# Altium PCB PCB1.PcbDoc
Units mm, origin at the board's own origin, x right, y up, seen from the top; angles counter-clockwise.
Board outline 142.56 x 70.61 mm, 2 copper layers (Top Layer, Bottom Layer); 72 components, 59 nets, 301 pads, 34 vias.
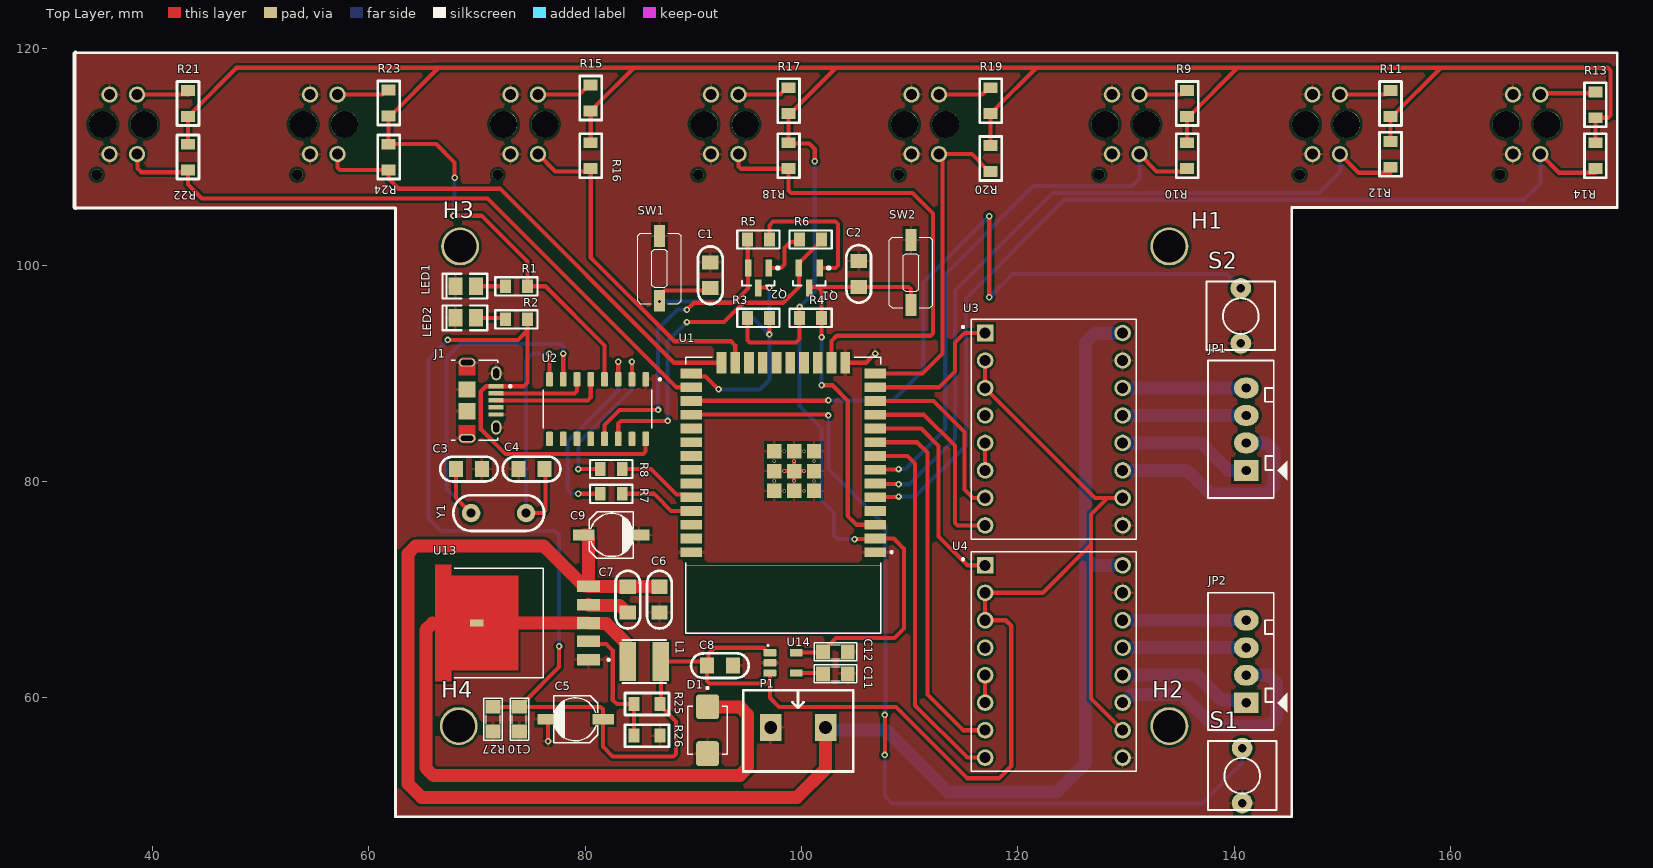
[diagram p0: Top Layer view]
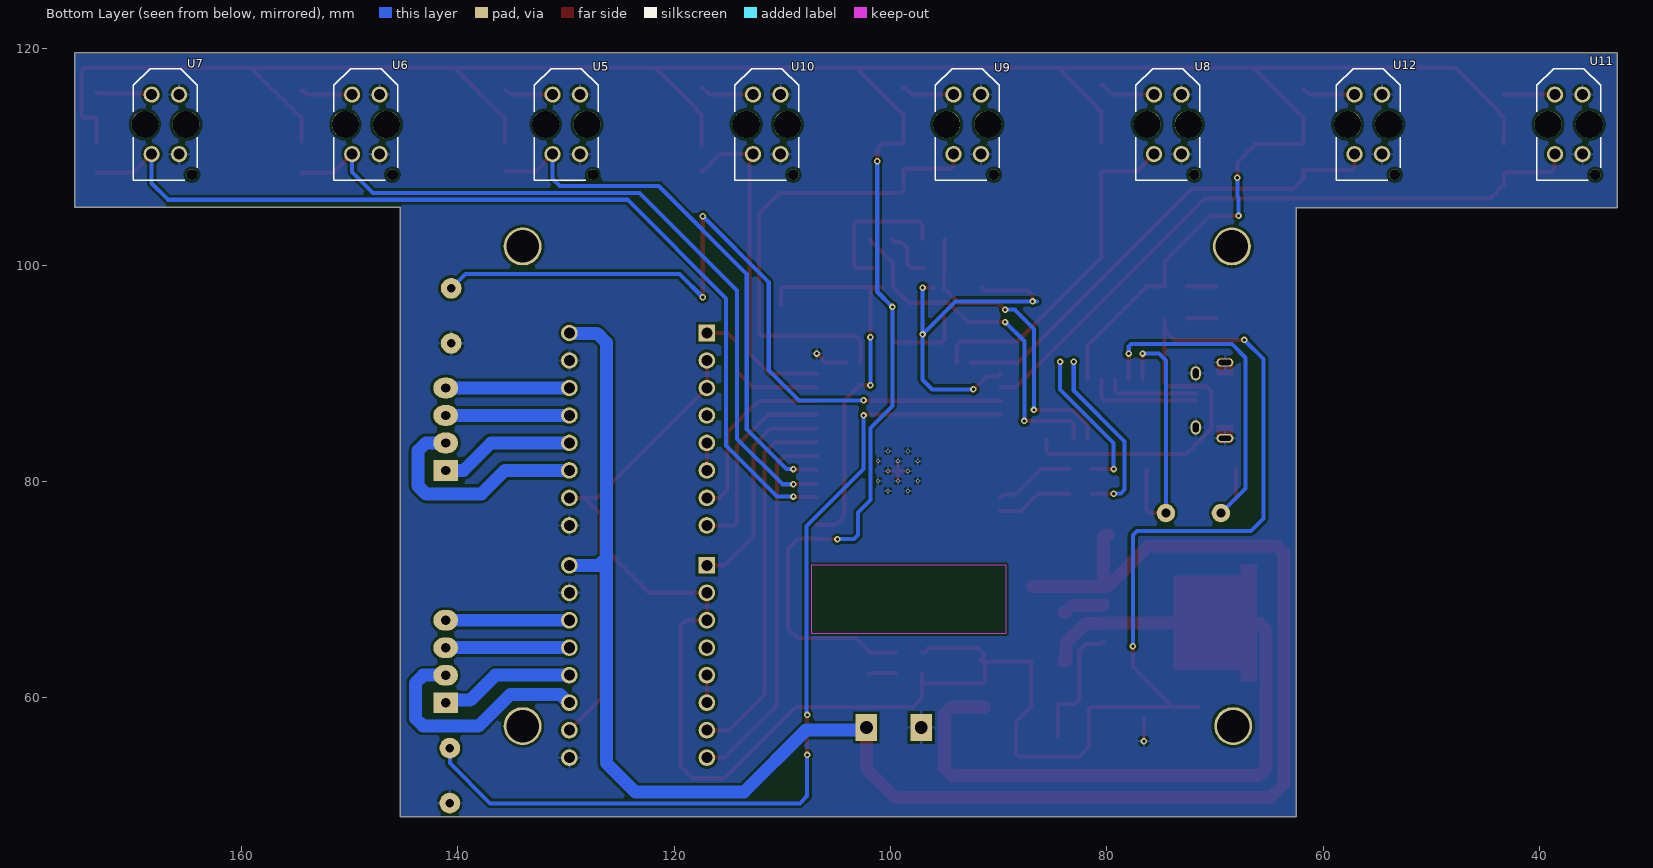
[diagram p1: Bottom Layer view, seen from below]
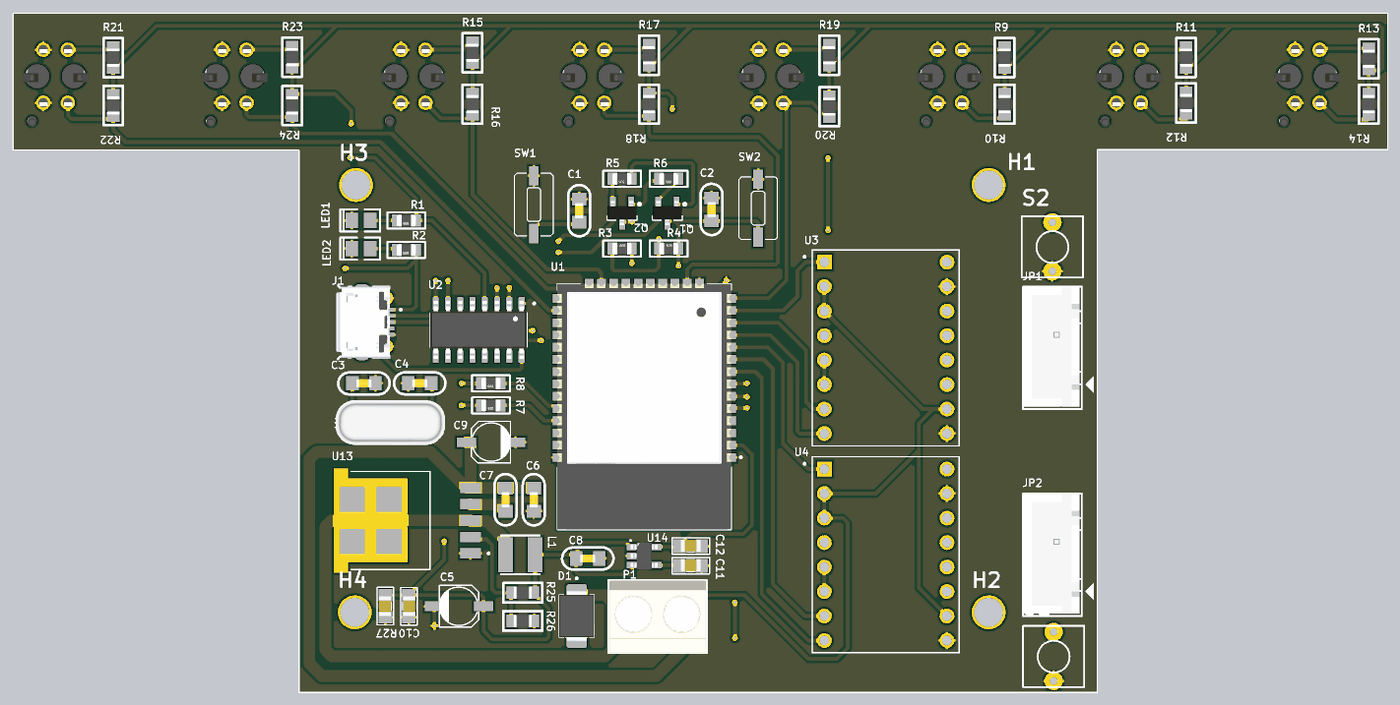
[diagram p2: 3D render of the assembled board from above, using the file's embedded part models]
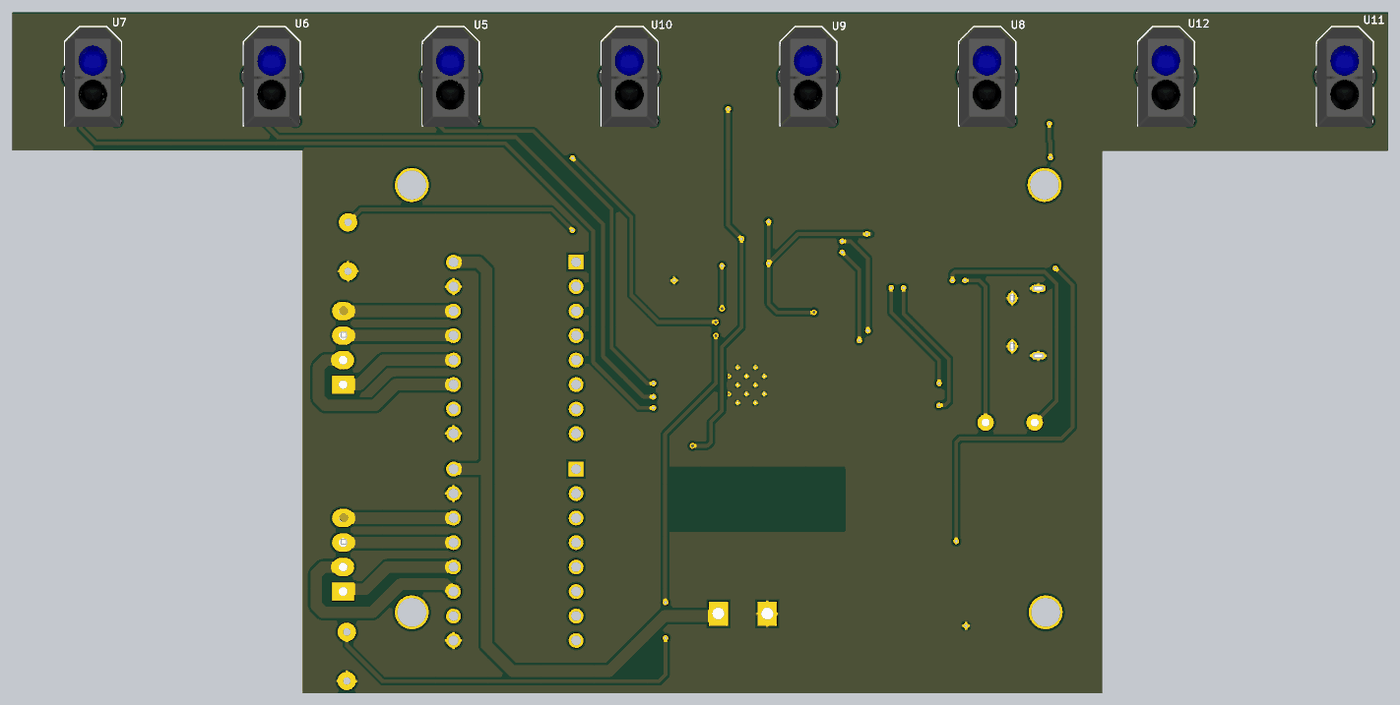
[diagram p3: 3D render of the assembled board from below, using the file's embedded part models]

## Layer stack, top to bottom
Top Solder: solder mask 0.0102, Solder Resist, Dk 3.5
Top Layer: signal copper 0.0356
Dielectric 1: dielectric 0.32, FR-4, Dk 4.8
Bottom Layer: signal copper 0.0356
Bottom Solder: solder mask 0.0102, Solder Resist, Dk 3.5

## Board outline
32.893,105.283 62.484,105.283 62.484,49.022 145.288,49.022 145.288,58.293 145.288,105.331 175.387,105.331 175.387,119.634 32.893,119.634 32.829,119.57 32.829,105.346

## Design rules (kind name [scope] priority, off if disabled: settings)
Clearance [All] p1: gap=0.254 ignorepadtopadclearanceinfootprint=TRUE
PolygonConnect [All] p1: connectstyle=Relief reliefconductorwidth=0.254 reliefentries=4 polygonreliefangle="90 Angle" airgapwidth=0.254
RoutingVias [All] p1: holewidth=0.3 width=0.6 viastyle="Through Hole" minholewidth=0.3 minwidth=0.6 maxholewidth=0.3 maxwidth=0.6
SolderMaskExpansion [All] p1: expansion=0.102 istentingtop=FALSE
Width [All] p1: maxlimit=1.2 minlimit=0.381 preferedwidth=0.381 minimp=50.000000 maximp=50.000000 favimp=50.000000
30 further rules are at their usual default settings.

## Classes and differential pairs
component class Stepper: JP1 JP2 U3 U4
component class Sensor: R9 R10 R11 R12 R13 R14 R15 R16 R17 R18 R19 R20 R21 R22 R23 R24 U5 U6 U7 U8 U9 U10 U11 U12
component class MCU: C1 C2 C3 C4 H1 H2 H3 H4 J1 LED1 LED2 Q1 Q2 R1 R2 R3 R4 R5 R6 R7 R8 S1 S2 SW1 SW2 U1 U2 Y1
component class "ECU supply": C5 C6 C7 C8 C9 C10 C11 C12 D1 L1 P1 R25 R26 R27 U13 U14

## Components (designator, comment, footprint, x,y, rotation, side; value= is the part's Value field where it differs from the comment)
C1 "Cap Non-pol" C-NP-0805 91.567,99.06 r270 top value=10uF
C2 "Cap Non-pol" C-NP-0805 105.283,99.187 r270 top value=10uF
C3 "Cap Non-pol" C-NP-0805 69.266,81.153 r180 top value=10uF
C4 "Cap Non-pol" C-NP-0805 75.057,81.153 r0 top value=10uF
C5 "" Cap_smd_4_3MM 79.121,58.039 r180 top
C6 "Cap Non-pol" C-NP-0805 86.868,69.088 r90 top value=105
C7 "Cap Non-pol" C-NP-0805 83.947,69.088 r90 top value=105
C8 "Cap Non-pol" C-NP-0805 92.456,62.992 r180 top value=105
C9 "10uF" Cap_smd_4_3MM 82.423,75.057 r0 top
C10 "104" SM-0805 73.914,58.039 r90 top value=103
C11 "105" SM-0805 103.124,62.23 r180 top value=103
C12 "105" SM-0805 103.124,64.262 r180 top value=103
D1 "SS24" DIOM5336X265N 91.313,57.023 r270 top
H1 "Hole" "LO KHOAN 3MM" 133.985,101.727 r0 top
H2 "Hole" "LO KHOAN 3MM" 133.985,57.404 r0 top
H3 "Hole" "LO KHOAN 3MM" 68.453,101.727 r0 top
H4 "Hole" "LO KHOAN 3MM" 68.326,57.404 r0 top
J1 "10118194-0001LF" AMPHENOL_10118194-0001LF 69.088,87.503 r270 top
JP1 "JP4" CON4 141.097,81.026 r90 top value="Connector 4"
JP2 "JP4" CON4 141.097,59.563 r90 top value="Connector 4"
L1 "SRN4018-2R7M" INDP4040X180N 85.471,63.373 r0 top
LED1 "HSMH-C170" LED.SMD.RED 68.961,98.044 r0 top
LED2 "HSMH-C170" LED.SMD.RED 68.961,95.123 r0 top
P1 "Header 2 - M" "Medium - Header 2" 99.695,57.277 r0 top
Q1 "C1815" SOT23N 100.711,98.806 r270 top
Q2 "C1815" SOT23N 96.012,98.806 r270 top
R1 "RES_SMD_0805" "DIEN TRO 0805" 73.66,98.044 r0 top value=1k
R2 "RES_SMD_0805" "DIEN TRO 0805" 73.66,94.996 r0 top value=1k
R3 "RES_SMD_0805" "DIEN TRO 0805" 96.012,95.123 r180 top value=10k-0805
R4 "RES_SMD_0805" "DIEN TRO 0805" 100.838,95.123 r180 top value=10k
R5 "RES_SMD_0805" "DIEN TRO 0805" 96.012,102.362 r0 top value=10k
R6 "RES_SMD_0805" "DIEN TRO 0805" 100.838,102.362 r0 top value=10k
R7 "RES_SMD_0805" "DIEN TRO 0805" 82.423,78.867 r0 top value=1k
R8 "RES_SMD_0805" "DIEN TRO 0805" 82.423,81.153 r0 top value=1k
R9 "RESISTOR" R-0805 135.636,114.935 r270 top value=330R
R10 "RESISTOR" R-0805 135.636,110.109 r90 top value=10K
R11 "RESISTOR" R-0805 154.432,114.935 r270 top value=330R
R12 "RESISTOR" R-0805 154.432,110.236 r90 top value=10K
R13 "RESISTOR" R-0805 173.355,114.808 r270 top value=330R
R14 "RESISTOR" R-0805 173.355,110.109 r90 top value=10K
R15 "RESISTOR" R-0805 80.518,115.443 r270 top value=330R
R16 "RESISTOR" R-0805 80.518,110.109 r90 top value=10K
R17 "RESISTOR" R-0805 98.806,115.189 r270 top value=330R
R18 "RESISTOR" R-0805 98.806,110.109 r90 top value=10K
R19 "RESISTOR" R-0805 117.475,115.189 r270 top value=330R
R20 "RESISTOR" R-0805 117.475,109.855 r90 top value=10K
R21 "RESISTOR" R-0805 43.307,114.935 r270 top value=330R
R22 "RESISTOR" R-0805 43.307,109.982 r90 top value=10K
R23 "RESISTOR" R-0805 61.849,114.986 r270 top value=330R
R24 "RESISTOR" R-0805 61.849,109.982 r90 top value=10K
R25 "RESISTOR" R-0805 85.725,59.436 r0 top value=10K
R26 "RESISTOR" R-0805 85.725,56.515 r180 top value=3.3K
R27 "1K" SM-0805 71.501,58.039 r270 top
S1 "Tact SW - 2Pin" SW2 140.716,50.292 r90 top
S2 "Tact SW - 2Pin" SW2 140.589,92.773 r90 top
SW1 "PTS635" TactSwitches.PTS635.SMT 86.868,99.695 r270 top
SW2 "PTS635" TactSwitches.PTS635.SMT 110.109,99.314 r270 top
U1 "ESP32-WROOM-32" MODULE_ESP32-WROOM-32 98.314,78.729 r180 top
U2 "CH340G" SOIC127P600X180-16N 81.153,86.697 r270 top
U3 "A4988" MODULE_A4988_STEPPER_MOTOR_DRIVER_CARRIER 123.317,84.836 r0 top
U4 "A4988" MODULE_A4988_STEPPER_MOTOR_DRIVER_CARRIER 123.317,63.373 r0 top
U5 "TCRT5000" OPTO_TCRT5000 129.952,113.005 r90 bottom
U6 "TCRT5000" OPTO_TCRT5000 148.476,113.005 r90 bottom
U7 "TCRT5000" OPTO_TCRT5000 167.001,113.005 r90 bottom
U8 "TCRT5000" OPTO_TCRT5000 74.378,113.005 r90 bottom
U9 "TCRT5000" OPTO_TCRT5000 92.903,113.005 r90 bottom
U10 "TCRT5000" OPTO_TCRT5000 111.427,113.005 r90 bottom
U11 "TCRT5000" OPTO_TCRT5000 37.329,113.005 r90 bottom
U12 "TCRT5000" OPTO_TCRT5000 55.854,113.005 r90 bottom
U13 "XL4015" CONV_XL4015 69.977,66.929 r180 top
U14 "RT9193-33GB" SOT94P279X129-5N 98.298,63.246 r0 top
Y1 "XTAL" XTAL 72.009,77.089 r270 top

## Footprints (in the part's own frame and the unit in brackets; to place one, negate y for a bottom-side part, rotate by r counter-clockwise, add the part's x,y. Pads: shape width x height; smd on the part's side, far side on the other; paste and mask are expansions set on the pad)
AMPHENOL_10118194-0001LF [mm]
  rect 0.4x1.35 smd: 1(-1.3,2.675) 2(-0.65,2.675) 3(0,2.675) 4(0.65,2.675) 5(1.3,2.675)
  oval 0.775x1.55 hole 0.5 slot 1.15 at 90 deg mask+0: SH1(-3.5,0) SH4(3.5,0)
  rect 1.5x1.55 smd: SH2(1,0) SH3(-1,0)
  oval 1.3x0.95 hole 0.55 slot 0.9 at 0 deg: SH5(-2.5,2.7) SH6(2.5,2.7)
  Top Layer region: -2.3,-0.775 -3.445,-0.775 -3.471,-0.774 -3.497,-0.772 -3.523,-0.769 -3.549,-0.764 -3.574,-0.758 -3.6,-0.751 -3.624,-0.742 -3.648,-0.732 -3.672,-0.721 -3.695,-0.708 -3.717,-0.694 -3.739,-0.68 -3.76,-0.664 -3.78,-0.647 -3.799,-0.629 -3.817,-0.61 -3.834,-0.59 -3.85,-0.569 -3.864,-0.547 -3.878,-0.525 -3.891,-0.502 -3.902,-0.478 -3.912,-0.454 -3.921,-0.43 -3.928,-0.404 -3.934,-0.379 -3.939,-0.353 -3.942,-0.327 -3.944,-0.301 -3.945,-0.275 -3.945,0.275 -3.944,0.301 -3.942,0.327 -3.939,0.353 -3.934,0.379 -3.928,0.404 -3.921,0.43 -3.912,0.454 -3.902,0.478 -3.891,0.502 -3.878,0.525 -3.864,0.547 -3.85,0.569 -3.834,0.59 -3.817,0.61 -3.799,0.629 -3.78,0.647 -3.76,0.664 -3.739,0.68 -3.717,0.694 -3.695,0.708 -3.672,0.721 -3.648,0.732 -3.624,0.742 -3.6,0.751 -3.574,0.758 -3.549,0.764 -3.523,0.769 -3.497,0.772 -3.471,0.774 -3.445,0.775 -2.3,0.775
  Top Layer region: 3.471,0.774 3.497,0.772 3.523,0.769 3.549,0.764 3.574,0.758 3.6,0.751 3.624,0.742 3.648,0.732 3.672,0.721 3.695,0.708 3.717,0.694 3.739,0.68 3.76,0.664 3.78,0.647 3.799,0.629 3.817,0.61 3.834,0.59 3.85,0.569 3.864,0.547 3.878,0.525 3.891,0.502 3.902,0.478 3.912,0.454 3.921,0.43 3.928,0.404 3.934,0.379 3.939,0.353 3.942,0.327 3.944,0.301 3.945,0.275 3.945,-0.275 3.944,-0.301 3.942,-0.327 3.939,-0.353 3.934,-0.379 3.928,-0.404 3.921,-0.43 3.912,-0.454 3.902,-0.478 3.891,-0.502 3.878,-0.525 3.864,-0.547 3.85,-0.569 3.834,-0.59 3.817,-0.61 3.799,-0.629 3.78,-0.647 3.76,-0.664 3.739,-0.68 3.717,-0.694 3.695,-0.708 3.672,-0.721 3.648,-0.732 3.624,-0.742 3.6,-0.751 3.574,-0.758 3.549,-0.764 3.523,-0.769 3.497,-0.772 3.471,-0.774 3.445,-0.775 2.3,-0.775 2.3,0.775 3.445,0.775
  silkscreen extent -3.7,-1.45 3.7,4.1, body extent -4.02,-2.68 4.02,2.85, height 2.67
C-NP-0805 [mm] "Chip Capacitor; Non-polarized; Body 2.0 x 1.3 mm (LxW typ) [2012]"
  rect 1.3x1.5 smd: 1(-1.194,0) 2(1.194,0)
  silkscreen extent -2.67,-1.14 2.66,1.14, body extent -0.8,-0.43 0.8,0.43, height 0.79
Cap_smd_4_3MM [mm] "10uF SMD"
  rect 2x1 smd: 1(-2.54,0) 2(2.54,0)
  silkscreen extent -2.03,-2.16 2.04,2.16, body extent -2.7,-2.16 2.73,2.09, height 4.51
CON4 [mil] "CON4"
  rect 75x90 hole 34: 1(0,0)
  oval 75x90 hole 34: 2(100,0) 3(200,0) 4(300,0)
  silkscreen extent -100,-150 400,140, body extent -90,-90 398,136, height 276
CONV_XL4015 [mm]
  rect 2.16x1.07 smd: 1(-10.335,3.4) 2(-10.335,1.7) 3(-10.335,0) 4(-10.335,-1.7) 5(-10.335,-3.4)
  rect 1.27x0.635 smd paste-2 mask+0: 3.1(0,0)
  Top Layer region: 3.835,-5.4 2.365,-5.4 2.365,-4.35 -3.835,-4.35 -3.835,4.35 2.365,4.35 2.365,5.4 3.835,5.4
  silkscreen extent -12.3,-5.08 2.05,5.08
"DIEN TRO 0805" [mm] "Chip Resistor; Body 2.0 x 1.3 mm (LxW typ)"
  rect 1x1.27 smd: 1(-1.016,0) 2(1.016,0)
  silkscreen extent -1.96,-0.84 1.96,0.84, body extent -1,-0.62 1,0.63, height 0.78
DIOM5336X265N [mm]
  rrect25% 2.29x2.12 smd: A(2.16,0) C(-2.16,0)
  silkscreen extent -4,-1.81 2.2,1.81, body extent -2.67,-1.81 2.67,1.81, height 2.65
INDP4040X180N [mm]
  rect 1.5x3.6 smd: 1(-1.525,0) 2(1.525,0)
  silkscreen extent -2,-2 2,2
LED.SMD.RED [mm]
  rect 1.3x1.6 smd: 1(0.948,0.006) 2(-0.952,0.006)
  silkscreen extent -2.13,-1.14 2,1.16, body extent -1.08,-0.64 1.08,0.64, height 1.14
"LO KHOAN 3MM" [mil]
  round 138 hole 118.1: 1(0,0)
"Medium - Header 2" [mm]
  rect 2x2.5 hole 1.2: 1(-2.54,0) 2(2.54,0)
  silkscreen extent -5.08,-4.08 5.08,3.43, body extent -5,-4.07 5,3.43, height 10
MODULE_A4988_STEPPER_MOTOR_DRIVER_CARRIER [mm]
  rect 1.53x1.53 hole 1.02: 1(-6.35,8.89)
  round 1.53 hole 1.02: 2(-6.35,6.35) 3(-6.35,3.81) 4(-6.35,1.27) 5(-6.35,-1.27) 6(-6.35,-3.81) 7(-6.35,-6.35) 8(-6.35,-8.89) 9(6.35,-8.89) 10(6.35,-6.35) 11(6.35,-3.81) 12(6.35,-1.27) 13(6.35,1.27) 14(6.35,3.81) 15(6.35,6.35) 16(6.35,8.89)
  silkscreen extent -8.5,-10.16 7.62,10.16
MODULE_ESP32-WROOM-32 [mm]
  rect 2x0.9 smd: 1(-8.5,5.26) 2(-8.5,3.99) 3(-8.5,2.72) 4(-8.5,1.45) 5(-8.5,0.18) 6(-8.5,-1.09) 7(-8.5,-2.36) 8(-8.5,-3.63) 9(-8.5,-4.9) 10(-8.5,-6.17) 11(-8.5,-7.44) 12(-8.5,-8.71) 13(-8.5,-9.98) 14(-8.5,-11.25) 25(8.5,-11.25) 26(8.5,-9.98) 27(8.5,-8.71) 28(8.5,-7.44) 29(8.5,-6.17) 30(8.5,-4.9) 31(8.5,-3.63) 32(8.5,-2.36) 33(8.5,-1.09) 34(8.5,0.18) 35(8.5,1.45) 36(8.5,2.72) 37(8.5,3.99) 38(8.5,5.26)
  rect 0.9x2 smd: 15(-5.715,-12.25) 16(-4.445,-12.25) 17(-3.175,-12.25) 18(-1.905,-12.25) 19(-0.635,-12.25) 20(0.635,-12.25) 21(1.905,-12.25) 22(3.175,-12.25) 23(4.445,-12.25) 24(5.715,-12.25)
  rect 1.33x1.33 smd: 39_1(-2.835,-0.405) 39_2(-1,-0.405) 39_3(0.835,-0.405) 39_4(-2.835,-2.24) 39_5(-1,-2.24) 39_6(0.835,-2.24) 39_7(-2.835,-4.075) 39_8(-1,-4.075) 39_9(0.835,-4.075)
  round 0.3 hole 0.2: 39_10(-1.917,-0.405) 39_11(-0.082,-0.405) 39_12(-2.835,-1.322) 39_13(-1,-1.322) 39_14(0.835,-1.322) 39_15(-1.917,-2.24) 39_16(-0.082,-2.24) 39_17(-2.835,-3.157) 39_18(-1,-3.157) 39_19(0.835,-3.157) 39_20(-1.917,-4.075) 39_21(-0.082,-4.075)
  Keep-Out Layer region: 9,6.45 -9,6.45 -9,12.75 9,12.75
  Keep-Out Layer region: 9,6.45 -9,6.45 -9,12.75 9,12.75
  silkscreen extent -10.1,-12.75 9,12.75, body extent -9,-12.75 9,12.75, height 3.2
OPTO_TCRT5000 [mm]
  round 1.5 hole 1: A(2.75,1.27) CATH(2.75,-1.27) COLL(-2.75,1.27) E(-2.75,-1.27)
  round 1 hole 1 unplated: ""(-4.65,-2.45)
  round 2.5 hole 2.5 unplated: ""(0,-1.9) ""(0,1.9)
  silkscreen extent -5.15,-2.95 5.15,2.95, body extent -5.25,-3.37 4.95,3.43, height 7.2
R-0805 [mm] "Chip Resistor; Body 2.0 x 1.3 mm (LxW typ) [2012]"
  rect 1x1.3 smd: 1(-1.194,0) 2(1.194,0)
  silkscreen extent -2.03,-1.02 2.03,1.02, body extent -0.95,-0.65 0.95,0.65, height 0.63
SM-0805 [mil] "Compoment SMD 80x50mil"
  rect 50x55 smd: 1(-45,0) 2(45,0)
  silkscreen extent -77,-34 76,33, body extent -40,-27 40,23, height 24
SOIC127P600X180-16N [mm]
  rrect25% 1.31x0.62 smd: 1(-2.75,4.445) 2(-2.75,3.175) 3(-2.75,1.905) 4(-2.75,0.635) 5(-2.75,-0.635) 6(-2.75,-1.905) 7(-2.75,-3.175) 8(-2.75,-4.445) 9(2.75,-4.445) 10(2.75,-3.175) 11(2.75,-1.905) 12(2.75,-0.635) 13(2.75,0.635) 14(2.75,1.905) 15(2.75,3.175) 16(2.75,4.445)
  silkscreen extent -2.85,-5 1.78,5.85, body extent -3,-5 3,5, height 1.8
SOT23N [mm] "SOT23, 3-Leads, Body 3.0x2.6mm (max), Pitch 0.95mm, IPC Medium Density"
  rect 1.55x0.6 smd: 1(-0.925,0.95) 2(-0.925,-0.95) 3(0.925,0)
  silkscreen extent -1.05,-1.5 0.7,1.93, body extent -1.27,-1.5 1.23,1.5, height 1.05
SOT94P279X129-5N [mm]
  rrect12% 1.17x0.67 smd: 1(-1.22,0.94) 2(-1.22,0) 3(-1.22,-0.94) 4(1.22,-0.94) 5(1.22,0.94)
  silkscreen extent -1.47,1.53 -1.33,1.67, body extent -1.4,-1.45 1.4,1.45, height 1.3
SW2 [mil]
  round 75 hole 31: 1(0,0) 2(200,0)
  silkscreen extent -25,-125 225,125
TactSwitches.PTS635.SMT [mil] "3,5 mm Tact Switches, PTS635 Series"
  rect 79x39 smd: 1(-118,0) 2(118,0)
  silkscreen extent -128,-79 128,79, body extent -135,-70 135,70, height 100
XTAL [mil] "Crystal, Thru-Hole; 2 Leads; Body 3.1 x 8.2 mm (Dia.xH); Solder pad 35mil"
  round 67 hole 32: 1(0,100) 2(0,-100)
  silkscreen extent -65,-165 65,165, body extent -92,-223 92,223, height 139

## Part data
C1 C2 C3 C4 C6 C7 C8: "Non-polarized Capacitor", LatestRevisionDate=17-Jul-2002, LatestRevisionNote="Re-released for DXP Platform.", PackageReference=RAD-0.3, Published=8-Jun-2000, Publisher="Altium Limited"
C5: library part Cap_Pol, "Polarized Capacitor", Capacitor Type=33uF, Manufacturer=FARNELL, Volt=25V, AEMS Code=2100110, ComponentLink1Description="Digikey Part Link", ComponentLink2Description="Open Datasheet", ComponentLink2URL=H:\LIBRARY\LIBRARY.Datasheet\, Published=13-April-2009, Publisher="Hoang Nguyen", Vendor=Digikey
C9: library part Cap_Pol, "Polarized Capacitor", Capacitor Type=Tant, Manufacturer=FARNELL, Volt=35V, AEMS Code=2100110, ComponentLink1Description="Digikey Part Link", ComponentLink2Description="Open Datasheet", ComponentLink2URL=H:\LIBRARY\LIBRARY.Datasheet\, Published=13-April-2009, Publisher="Hoang Nguyen", Vendor=Digikey
C10 C11 C12: library part CM, "Cap SMD"
D1: "Diode Schottky 40V 2A Surface Mount DO-214AA (SMB)", Package="DO-214AA ON Semiconductor", Availability="In Stock", Check_prices=https://www.snapeda.com/parts/SS24/Onsemi/view-part/?ref=eda, MF="ON Semiconductor", MP=SS24, Price=None, SnapEDA_Link=https://www.snapeda.com/parts/SS24/Onsemi/view-part/?ref=snap
H1 H2 H3 H4: "Hole 3mm"
J1: "Micro USB, Input Output Connectors, B TYPE RECEPTACLE with flange", Package=None, Check_prices=https://www.snapeda.com/parts/10118194-0001LF/Amphenol+FCI/view-part/?ref=eda, MF="Amphenol ICC", MP=10118194-0001LF, SnapEDA_Link=https://www.snapeda.com/parts/10118194-0001LF/Amphenol+FCI/view-part/?ref=snap
JP1 JP2: library part Con4, "Connector 4"
L1: "2.7ÂµH Semi-Shielded Wirewound Inductor 2.3A 52mOhm Max Nonstandard", Package="Nonstandard Bourns", Availability=Good, Check_prices=https://www.snapeda.com/parts/SRN4018-2R7M/Bourns/view-part/46408/?ref=eda, MF=Bourns, MP=SRN4018-2R7M, Price=None, Purchase-URL=https://pricing.snapeda.com/search/part/SRN4018-2R7M/?ref=eda, SnapEDA_Link=https://www.snapeda.com/parts/SRN4018-2R7M/Bourns/view-part/46408/?ref=snap
LED1 LED2: library part LED_1, "Typical GaAs SMD LED", Color=RED, Manufacturer="Lite-On Inc", ComponentLink1Description="Digikey Part Link", ComponentLink2Description="Open Datasheet", ComponentLink2URL=H:\LIBRARY\LIBRARY.Datasheet\, Published=13-April-2009, Publisher="Hoang Nguyen", Type="Cong ty RP", Vendor=Digikey
P1: "Header, 2-Pin, Medium", LatestRevisionDate=17-Jul-2002, LatestRevisionNote="Re-released for DXP Platform.", Publisher="Altium Limited"
Q1 Q2: "Q2SC1815", PSpiceTemplate="Q^@REFDES %c %b %e @MODEL", COMPONENT=2SC1815, ComponentLink1Description="Digikey Part Link", ComponentLink2Description="Open Datasheet", ComponentLink2URL=H:\LIBRARY\LIBRARY.Datasheet\, Price=500VND, Published=13-April-2009, Publisher="Hoang Nguyen", Vendor=Digikey
R1 R2 R3 R4 R5 R6 R7 R8: "RES_0805", LatestRevisionDate=17-Jul-2002, LatestRevisionNote="Re-released for DXP Platform.", PackageReference=AXIAL-0.4, Published=8-Jun-2000, Publisher="Altium Limited"
R9 R10 R11 R12 R13 R14 R15 R16 R17 R18 R19 R20 R21 R22 R23 R24 R25 R26: "Resistor", LatestRevisionDate=17-Jul-2002, LatestRevisionNote="Re-released for DXP Platform.", PackageReference=AXIAL-0.3, Published=8-Jun-2000, Publisher="Altium Limited"
R27: library part RM, "Resistor SMD"
S1 S2: "Switch button 2 pin"
SW1 SW2: library part "SW TACT MOM SPST", "SWITCH TACT MOM SPST SMD", Manufacturer="C&K Components", Manufacturer P/N="PTS635SL25SMTR LFS", ComponentLink1Description="Digikey Part Link", ComponentLink1URL=http://search.digikey.com/scripts/DkSearch/dksus.dll?Detail&name=CKN1573CT-ND, ComponentLink2Description="Open Datasheet", ComponentLink2URL=H:\LIBRARY\LIBRARY.Datasheet\SBLCDA4_Specification.pdf, Published=13-April-2009, Publisher="Hoang Nguyen", Vendor=Digikey, Vendor P/N=CKN9119CT-ND
U1: "Bluetooth, WiFi 802.11b/g/n, Bluetooth v4.2 +EDR, Class 1, 2 and 3 Transceiver Module 2.4GHz ~ 2.5GHz Antenna Not Included, U.FL Surface Mount", Package="Module Espressif Systems", Availability="In Stock", Check_prices=https://www.snapeda.com/parts/ESP32-WROOM-32/Espressif+Systems/view-part/?ref=eda, MF="Espressif Systems", MP=ESP32-WROOM-32, Price=None, Purchase-URL=https://pricing.snapeda.com/search/part/ESP32-WROOM-32/?ref=eda, SnapEDA_Link=https://www.snapeda.com/parts/ESP32-WROOM-32/Espressif+Systems/view-part/?ref=snap
U2: "USB Interface Integrated Circuit", Package=None, Availability="Not in stock", Check_prices=https://www.snapeda.com/parts/Ch340G/WCH/view-part/?ref=eda, MF=WCH, MP=Ch340G, Price=None, SnapEDA_Link=https://www.snapeda.com/parts/Ch340G/WCH/view-part/?ref=snap
U3 U4: library part A4988_STEPPER_MOTOR_DRIVER_CARRIER, "Stepper motor controler; IC: A4988; 1A; Uin mot: 8Ã·35V", Package=None, Availability=Unavailable, MP=A4988_STEPPER_MOTOR_DRIVER_CARRIER, Price=None
U5 U6 U7 U8 U9 U10 U11 U12: "950 nm 60 mA Through Hole Reflective Optical Sensor with Transistor Output", Package=None, Availability=Unavailable, MP=TCRT5000, Price=None
U13: "5A 180KHz 36V Buck DC to DC Converter", Package=None, Availability=Unavailable, MP=XL4015, Price=None
U14: "Linear Voltage Regulator IC Positive Fixed 1 Output 300mA TSOT-23-5", Package="SOT-23-5 Richtek", Check_prices=https://www.snapeda.com/parts/RT9193-33GB/Richtek+USA+Inc./view-part/?ref=eda, Digi-Key_Part_Number=1028-1014-2-ND, MF="Richtek USA", MP=RT9193-33GB, Purchase-URL=https://pricing.snapeda.com/search/part/RT9193-33GB/?ref=eda, SnapEDA_Link=https://www.snapeda.com/parts/RT9193-33GB/Richtek+USA+Inc./view-part/?ref=snap
Y1: "Crystal Oscillator", LatestRevisionDate=17-Jul-2002, LatestRevisionNote="Re-released for DXP Platform.", PackageReference=R38, Published=8-Jun-2000, Publisher="Altium Limited"

## Via types
v1: diameter 0.6, hole 0.3, Top Layer to Bottom Layer, 34 vias

## Nets (pads, with @x,y where several pads share a name; then routed paths per layer and width w, separated by ;. In a path a pad name is that pad's centre, name@x,y a point inside that pad or via, vN(x,y) a via of type N, cw(c..) or ccw(c..) an arc to the next point about the centre after c; other vN are vias at no path point)
3V3: C12.2 R1.2 R3.2 R4.2 R9.2 R10.2 R11.2 R12.2 R13.2 R14.2 R15.2 R16.2 R17.2 R18.2 R19.2 R20.2 R21.2 R22.2 R23.2 R24.2 U1.2 U2.4 U14.5 | length 308.1
  Top Layer w0.381: R21.2@43.307,113.36 R22.2@43.307,111.322 ; R21.2 43.457,113.741 43.767,114.051 43.767,114.201 47.803,118.237 66.444,118.237 ; v1(67.835,104.567) 70.439,104.567 74.676,100.33 R1.2 76.327,98.044 81.788,92.583 U2.4 ; v1(67.945,108.077) 67.945,109.474 66.243,111.176 R24.2 R23.2 61.999,113.792 66.444,118.237 ; R16.2 R15.2 80.668,114.249 80.978,114.559 80.978,114.709 84.506,118.237 ; R3.2 94.996,93.06 95.219,92.837 99.472,92.837 99.822,93.187 R4.2 v1(99.822,96.139) ; U14.5 101.905,64.186 C12.2 101.981,64.325 103.188,65.532 108.585,65.532 109.474,66.421 109.474,73.787 108.522,74.739 U1.2 106.783,74.708 104.934,74.708 v1(104.902,74.676) ; v1(101.219,109.601) 101.219,110.744 100.711,111.252 98.857,111.252 R18.2 R17.2 98.956,113.995 103.198,118.237 ; R20.2 R19.2 117.625,113.995 117.935,114.305 117.935,114.455 121.717,118.237 ; R10.2 R9.2 135.786,113.741 140.282,118.237 ; R12.2 R11.2 154.582,113.741 159.078,118.237 ; R14.2 R13.2 174.529,113.614 174.752,113.837 174.752,117.983 174.498,118.237 159.078,118.237 ; R22.2@43.307,111.322 43.453,111.322 R22.2 R22.2@43.307,111.322 ; 66.444,118.237 84.506,118.237 ; 84.506,118.237 103.198,118.237 ; 103.198,118.237 121.717,118.237 ; 121.717,118.237 140.282,118.237 ; 140.282,118.237 159.078,118.237
  Bottom Layer w0.381: v1(67.835,104.567) 67.835,106.246 67.945,106.356 v1(67.945,108.077) ; v1(101.219,109.601) 101.219,97.536 v1(99.822,96.139) 99.822,86.995 101.854,84.963 101.854,78.293 102.997,77.15 102.997,75.057 103.378,74.676 v1(104.902,74.676)
12V: C6.2 C7.2 C9.1 P1.2 U3.16 U4.16 U13.5 | length 169.4
  Top Layer w1.2: C9.1 80.183,75.057 80.283,74.957 80.283,74.657 80.312,74.628 U13.5 ; C6.2 86.844,70.305 83.947,70.305 80.336,70.305 U13.5 ; P1.2 102.235,53.467 99.568,50.8 64.897,50.8 63.627,52.07 63.627,73.338 64.33,74.041 76.185,74.041 79.897,70.329 U13.5
  Bottom Layer w1.2: P1.2 102.489,57.023 107.823,57.023 113.538,51.308 123.571,51.308 126.238,53.975 126.238,72.966 ; U4.16 126.941,72.263 126.238,72.966 ; U3.16 129.642,93.701 127.102,93.701 126.238,92.837 126.238,72.966
+5: C5.1 C8.2 C10.2 J1.1 L1.2 R2.2 R25.2 R27.1 U2.16 U3.2 U3.3 U3.10 U4.2 U4.3 U4.10 U14.1 U14.3 | length 236.9
  Top Layer w0.381: v1(67.31,93.091) 73.787,93.091 74.676,93.98 ; R27.1 C10.2 C10.2@73.977,59.182 ; R2.2@74.676,95.093 R2.2 74.676,93.98 ; v1(77.597,64.77) 77.597,62.865 74.422,59.69 74.422,59.627 C10.2@73.977,59.182 ; U2.16 85.598,82.773 85.375,82.55 72.644,82.55 70.358,84.836 70.358,88.321 70.841,88.804 71.287,88.804 74.325,88.803 74.676,89.154 74.676,93.98 ; C8.2@90.881,63.373 L1.2 86.996,59.209 88.392,57.813 88.392,54.833 88.169,54.61 82.55,54.61 81.661,55.499 81.661,58.959 81.438,59.182 C10.2@73.977,59.182 ; C8.2@91.492,63.322 C8.2@91.722,63.552 ; 97.028,61.564 96.805,61.341 91.485,61.341 91.262,61.564 C8.2 ; U14.3 97.078,60.021 97.917,59.182 108.712,59.182 115.316,52.578 118.237,52.578 119.38,53.721 119.38,66.675 118.872,67.183 U4.3 U4.2 122.301,69.723 126.746,74.168 ; U14.1 96.828,64.186 96.683,64.331 96.683,64.42 96.46,64.643 91.948,64.643 91.395,64.09 91.395,63.455 C8.2@91.262,63.322 ; U3.2 U3.3 127.127,78.486 128.27,78.486 ; U4.10 126.746,59.944 126.746,74.168 ; U3.10 128.27,78.486 ; C8.2 C8.2@91.262,63.322 ; C8.2 90.932,63.322 C8.2@91.262,63.322 ; 126.746,74.168 126.746,76.962 128.27,78.486
  Bottom Layer w0.381: v1(67.31,93.091) 65.532,91.313 65.532,76.581 66.675,75.438 77.216,75.438 77.597,75.057 v1(77.597,64.77)
ADC1_0: U1.4
BT1: S2.2 U1.27 | length 71.4
  Top Layer w0.381: U1.27 89.846,87.471 102.457,87.471 v1(102.489,87.503) ; v1(117.348,97.028) v1(117.348,104.521)
  Bottom Layer w0.381: v1(102.489,87.503) 108.458,87.503 111.252,90.297 111.252,98.425 v1(117.348,104.521) ; v1(117.348,97.028) 119.507,99.187 139.255,99.187 S2.2@140.462,97.98
BT2: S1.2 U1.28 | length 86.3
  Top Layer w0.381: U1.28 89.846,86.201 102.335,86.201 102.43,86.106 v1(102.489,86.106) ; v1(107.696,54.737) v1(107.696,58.438)
  Bottom Layer w0.381: v1(102.489,86.106) 102.489,81.153 107.758,75.884 107.758,58.655 107.738,58.634 107.738,58.479 v1(107.696,58.438) ; v1(107.696,54.737) 107.696,50.927 108.36,50.263 137.004,50.263 140.716,53.975 S1.2
D+: J1.3 U2.5 | length 10.6
  Top Layer w0.381: J1.3 80.264,87.503 80.518,87.757 U2.5
D-: J1.2 U2.6 | length 8.6
  Top Layer w0.381: J1.2 79.009,88.153 79.248,88.392 U2.6
DTR: Q2.2 R5.1 U2.13 | length 28.7
  Top Layer w0.381: U2.13 81.788,85.217 83.185,86.614 v1(86.741,86.614) ; v1(89.408,95.885) 90.043,96.52 93.726,96.52 95.062,97.856 Q2.2 95.029,99.764 95.029,102.329 R5.1
  Bottom Layer w0.381: v1(86.741,86.614) 86.741,94.107 88.519,95.885 v1(89.408,95.885)
EN: C2.2 Q1.3 R4.1 SW2.2 U1.3 | length 36.8
  Top Layer w0.381: Q1.3 100.711,97.884 100.82,97.993 101.473,97.993 ; v1(101.854,88.9) 102.87,88.9 104.267,87.503 104.267,76.835 105.093,76.009 U1.3 ; v1(101.854,93.345) R4.1 101.854,97.612 101.473,97.993 ; SW2.2 110.109,97.77 109.886,97.993 C2.2 101.473,97.993
  Bottom Layer w0.381: v1(101.854,88.9) v1(101.854,93.345)
GND: C1.1 C2.1 C3.1 C4.1 C5.2 C6.1 C8.1 C9.2 C10.1 C11.1 C12.1 D1.A J1.5 J1.SH1 J1.SH2 J1.SH3 J1.SH4 J1.SH5 J1.SH6 LED1.2 LED2.2 P1.1 R26.1 R27.2 S1.1 S2.1 SW1.1 SW2.1 U1.1 U1.15 U1.38 U1.39_1 U1.39_2 U1.39_3 U1.39_4 U1.39_5 U1.39_6 U1.39_7 U1.39_8 U1.39_9 U1.39_10 U1.39_11 U1.39_12 U1.39_13 U1.39_14 U1.39_15 U1.39_16 U1.39_17 U1.39_18 U1.39_19 U1.39_20 U1.39_21 U2.1 U3.9 U3.15 U4.9 U4.15 U5.CATH U5.E U6.CATH U6.E U7.CATH U7.E U8.CATH U8.E U9.CATH U9.E U10.CATH U10.E U11.CATH U11.E U12.CATH U12.E U13.1 U14.2 | length 8.8
  Top Layer w0.381: v1(76.581,56.007) C5.2 ; U1.39_16 U1.39_5 ; U1.39_13 U1.39_5 ; U1.39_18 U1.39_5 ; U1.39_15 U1.39_5 ; U1.15 105.965,90.979 v1(106.807,91.821)
IO0: C1.2 Q2.3 R3.1 SW1.2 U1.25 | length 36.5
  Top Layer w0.381: SW1.2 86.868,97.206 87.325,97.663 91.364,97.663 C1.2 ; U1.25 90.074,89.719 91.129,89.719 v1(92.329,88.519) ; Q2.3 96.048,97.917 v1(97.028,97.917) ; v1(97.028,93.599) R3.1
  Bottom Layer w0.381: 86.487,96.647 93.98,96.647 v1(97.028,93.599) ; v1(92.329,88.519) 96.139,88.519 97.028,89.408 v1(97.028,93.599) ; v1(97.028,97.917) v1(97.028,93.599)
  other v1: 86.868,96.647
LDIR: U1.11 U3.8 | length 18.6
  Top Layer w0.381: U1.11 111.316,86.169 114.173,83.312 114.173,76.169 114.396,75.946 U3.8
LEN: U1.13 U3.1 | length 13.8
  Top Layer w0.381: U1.13 112.712,88.709 114.173,90.17 114.173,92.837 115.062,93.726 U3.1
LSTEP: U1.12 U3.7 | length 17
  Top Layer w0.381: U1.12 112.205,87.439 115.062,84.582 115.062,79.248 115.824,78.486 U3.7
NetC3_2: C3.2 U2.7 Y1.2 | length 34.4
  Top Layer w0.381: C3.2 68.072,78.486 Y1.2 ; U2.7 v1(77.978,91.821)
  Bottom Layer w0.381: Y1.2 67.183,79.375 67.183,91.44 68.453,92.71 77.755,92.71 77.978,92.487 v1(77.978,91.821)
NetC4_2: C4.2 U2.8 Y1.1 | length 24.6
  Top Layer w0.381: Y1.1 76.073,77.089 76.327,77.343 76.327,81.077 C4.2 ; U2.8 v1(76.708,91.821)
  Bottom Layer w0.381: Y1.1 74.549,91.186 75.184,91.821 v1(76.708,91.821)
NetC7_1: C7.1 U13.4 | length 3.9
  Top Layer w1.2: U13.4 80.377,68.564 83.177,68.564 83.847,67.894 C7.1
NetC11_2: C11.2 U14.4 | length 2.5
  Top Layer w0.381: U14.4 101.905,62.306 C11.2
NetD1_C: D1.C L1.1 U13.3 U13.3.1 | length 71.6
  Top Layer w0.381: 65.913,66.929 U13.3.1
  Top Layer w1.2: 65.913,66.929 65.278,66.294 65.278,53.535 65.981,52.832 94.293,52.832 94.996,53.535 94.996,58.48 94.293,59.183 D1.C ; 71.628,66.929 U13.3 80.377,66.864 81.98,66.864 83.796,65.048 83.796,63.523 L1.1
NetJP1_1: JP1.1 U3.12 | length 12.5
  Bottom Layer w1.2: U3.12 136.906,83.566 139.446,81.026 JP1.1
NetJP1_2: JP1.2 U3.11 | length 21.3
  Bottom Layer w1.2: U3.11 135.636,81.026 137.795,78.867 142.934,78.867 143.637,79.57 143.637,82.863 142.934,83.566 JP1.2
NetJP1_3: JP1.3 U3.13 | length 11.4
  Bottom Layer w1.2: U3.13 JP1.3
NetJP1_4: JP1.4 U3.14 | length 11.4
  Bottom Layer w1.2: U3.14 JP1.4
NetJP2_1: JP2.1 U4.12 | length 12.2
  Bottom Layer w1.2: U4.12 136.525,62.103 138.833,59.795 140.611,59.795 JP2.1@140.843,59.563
NetJP2_2: JP2.2 U4.11 | length 22.7
  Bottom Layer w1.2: U4.11 129.756,59.563 130.518,60.325 135.131,60.325 138.052,57.404 143.188,57.404 143.891,58.107 143.891,61.4 143.188,62.103 JP2.2@140.843,62.103
NetJP2_3: JP2.3 U4.13 | length 11.2
  Bottom Layer w1.2: U4.13 JP2.3@140.843,64.643
NetJP2_4: JP2.4 U4.14 | length 11.2
  Bottom Layer w1.2: U4.14 140.716,67.183 JP2.4@140.843,67.31
NetLED1_1: LED1.1 R1.1 | length 2.7
  Top Layer w0.381: LED1.1 72.638,98.05 R1.1
NetLED2_1: LED2.1 R2.1 | length 2.8
  Top Layer w0.381: LED2.1 72.511,95.129 R2.1
NetQ1_1: Q1.1 R5.2 | length 13.5
  Top Layer w0.381: R5.2 97.028,103.663 97.378,104.013 103.155,104.013 103.378,103.79 103.378,99.954 103.155,99.731 Q1.1
NetQ2_1: Q2.1 R6.1 | length 4.8
  Top Layer w0.381: Q2.1 98.08,99.731 98.425,100.076 98.425,101.6 98.974,102.149 99.609,102.149 R6.1
NetR7_1: R7.1 U2.3 | length 18.6
  Top Layer w0.381: v1(79.375,78.867) R7.1 ; U2.3 v1(83.058,91.059)
  Bottom Layer w0.381: v1(79.375,78.867) 79.333,78.909 78.698,78.909 78.359,79.248 78.359,83.693 83.058,88.392 v1(83.058,91.059)
NetR8_1: R8.1 U2.2 | length 15.6
  Top Layer w0.381: v1(79.375,81.153) R8.1 ; U2.2 v1(84.328,91.059)
  Bottom Layer w0.381: v1(79.375,81.153) 79.375,83.566 84.328,88.519 v1(84.328,91.059)
NetR9_1: R9.1 U5.A | length 4.6
  Top Layer w0.381: U5.A 135.112,115.755 135.486,116.129 R9.1
NetR11_1: R11.1 U6.A | length 4.8
  Top Layer w0.381: U6.A 153.908,115.755 154.282,116.129 R11.1
NetR13_1: R13.1 U7.A | length 5.2
  Top Layer w0.381: U7.A 168.395,115.878 173.231,115.878 R13.1
NetR15_1: R15.1 U8.A | length 5.2
  Top Layer w0.381: U8.A 79.486,115.755 80.368,116.637 R15.1
NetR17_1: R17.1 U9.A | length 4.9
  Top Layer w0.381: U9.A 98.028,115.755 98.656,116.383 R17.1
NetR19_1: R19.1 U10.A | length 5
  Top Layer w0.381: U10.A 116.697,115.755 117.325,116.383 R19.1
NetR21_1: R21.1 U11.A | length 4.7
  Top Layer w0.381: U11.A 38.602,115.751 43.304,115.751 R21.1@43.307,115.748
NetR23_1: R23.1 U12.A | length 4.9
  Top Layer w0.381: U12.A 61.274,115.755 61.699,116.18 R23.1
NetR25_1: R25.1 R26.2 U13.2 | length 12.2
  Top Layer w0.381: U13.2 80.566,64.975 81.964,64.975 82.169,64.77 82.55,64.389 82.55,59.817 82.931,59.436 R25.1 R26.2
NetU3_5: U3.5 U3.6 | length 2.5
  Top Layer w0.381: U3.6 U3.5
NetU4_5: U4.5 U4.6 | length 2.5
  Top Layer w0.381: U4.6 U4.5
RDIR: U1.8 U4.8 | length 34.8
  Top Layer w0.381: U1.8 109.792,82.359 110.49,81.661 110.49,59.309 115.316,54.483 U4.8
REN: U1.10 U4.1 | length 20.3
  Top Layer w0.381: U1.10 111.062,84.899 112.664,83.297 112.664,74.915 115.316,72.263 U4.1
RSTEP: U1.9 U4.7 | length 34.3
  Top Layer w0.381: U1.9 110.681,83.629 111.633,82.677 111.633,60.325 114.935,57.023 U4.7
RTS: Q1.2 R6.2 U2.14 | length 32.9
  Top Layer w0.381: U2.14 83.058,85.344 83.312,85.598 v1(87.63,85.598) ; v1(89.408,94.742) 92.846,94.742 94.624,96.52 98.298,96.52 99.761,97.983 Q1.2 99.761,100.206 101.473,101.917 101.544,101.917 101.854,102.227 R6.2
  Bottom Layer w0.381: v1(87.63,85.598) 87.63,92.964 v1(89.408,94.742)
RXD0: R8.2 U1.34 | length 7.5
  Top Layer w0.381: R8.2 86.106,81.153 88.45,78.809 89.554,78.809 U1.34
S1: R10.1 U1.7 U5.COLL | length 51.3
  Top Layer w0.381: U1.7 106.846,81.121 108.934,81.121 v1(108.966,81.153) ; U5.COLL 132.815,108.661 R10.1@135.636,108.661
  Bottom Layer w0.381: v1(108.966,81.153) 109.601,81.153 113.284,84.836 113.284,99.187 121.412,107.315 130.556,107.315 131.222,107.981 U5.COLL
S2: R12.1 U1.6 U6.COLL | length 70
  Top Layer w0.381: U1.6 106.846,79.787 108.935,79.787 v1(108.966,79.756) ; U6.COLL 151.467,108.534 154.432,108.534
  Bottom Layer w0.381: v1(108.966,79.756) 109.982,79.756 114.173,83.947 114.173,97.663 123.19,106.68 147.828,106.68 149.746,108.598 U6.COLL
S3: R14.1 U1.5 U7.COLL | length 89.9
  Top Layer w0.381: U1.5 106.846,78.581 108.934,78.581 v1(108.966,78.613) ; U7.COLL 169.991,108.534 R14.1@173.355,108.534
  Bottom Layer w0.381: v1(108.966,78.613) 110.49,78.613 115.189,83.312 115.189,96.932 124.302,106.045 166.751,106.045 168.271,107.565 U7.COLL
S4: R16.1 U1.23 U8.COLL | length 31.8
  Top Layer w0.381: U8.COLL 77.242,108.661 80.518,108.661 80.518,100.719 88.273,92.964 93.472,92.964 93.869,92.567 U1.23
S5: R18.1 U1.16 U9.COLL | length 44.6
  Top Layer w0.381: U9.COLL 94.173,109.123 94.396,108.9 R18.1@98.791,108.9 ; R18.1@98.806,108.661 98.806,106.903 99.029,106.68 110.236,106.68 112.141,104.775 112.141,93.695 111.918,93.472 103.251,93.472 102.759,92.98 U1.16
S6: R20.1 U1.14 U10.COLL | length 31
  Top Layer w0.381: U1.14 111.188,89.979 113.03,91.821 113.03,109.619 112.697,109.952 U10.COLL 115.732,110.255 117.325,108.661 R20.1
S7: R22.1 U1.26 U11.COLL | length 61.5
  Top Layer w0.381: U11.COLL 38.641,110.213 38.641,108.933 38.989,108.585 43.256,108.585 43.307,108.534 43.307,107.442 44.577,106.172 70.993,106.172 88.456,88.709 U1.26
S8: R24.1 U1.24 U12.COLL | length 44.7
  Top Layer w0.381: U12.COLL 57.124,109.011 57.347,108.788 R24.1 61.859,108.778 61.859,107.94 62.738,107.061 72.136,107.061 88.218,90.979 U1.24
TXD0: R7.2 U1.35 | length 7
  Top Layer w0.381: R7.2 86.36,78.867 86.487,78.74 87.948,77.279 U1.35
pads on no net: H1.1 H2.1 H3.1 H4.1 J1.4 U1.17 U1.18 U1.19 U1.20 U1.21 U1.22 U1.29 U1.30 U1.31 U1.32 U1.33 U1.36 U1.37 U2.9 U2.10 U2.11 U2.12 U2.15 U3.4 U4.4 U5. U6. U7. U8. U9. U10. U11. U12.

## Polygon pours and split planes (outlines as drawn)
GND on Bottom Layer "GND_L02_P001" (solid, remove dead copper, pour order 1): 32.893,119.507 175.387,119.507 175.387,105.283 145.288,105.283 145.288,49.022 62.484,49.022 62.484,105.283 32.893,105.283
GND on Top Layer "GND_L01_P000" (solid, remove dead copper, pour order 0): 32.893,119.507 33.02,119.634 175.387,119.634 175.387,105.283 145.288,105.283 145.288,49.022 62.484,49.022 62.484,105.283 32.893,105.283

## Silkscreen, mask and mechanical layers (free items; w line width, h text height)
Top Overlay:
  lines w0.254: 32.893,105.283 62.484,105.283 62.484,49.022 145.288,49.022 145.288,58.293 145.288,105.331 175.387,105.331 175.387,119.634 174.73,119.634 32.893,119.634
  lines w0.381: 32.893,105.283 32.829,105.346 32.829,111.757 32.829,119.57 32.893,119.634

## Text inside footprints (layer, text, board x,y; h text height)
U1: Mechanical 13 "ANTENNA" at 104.314,69.729 h0.76 r180